# Altium PCB PCB_microdevel_actel_ascii.PcbDoc
Units mm, origin at the board's own origin, x right, y up, seen from the top; angles counter-clockwise.
Board outline 52.7 x 52.4 mm, 2 copper layers (Top Layer, Bottom Layer); 53 components, 88 nets, 326 pads, 111 vias.
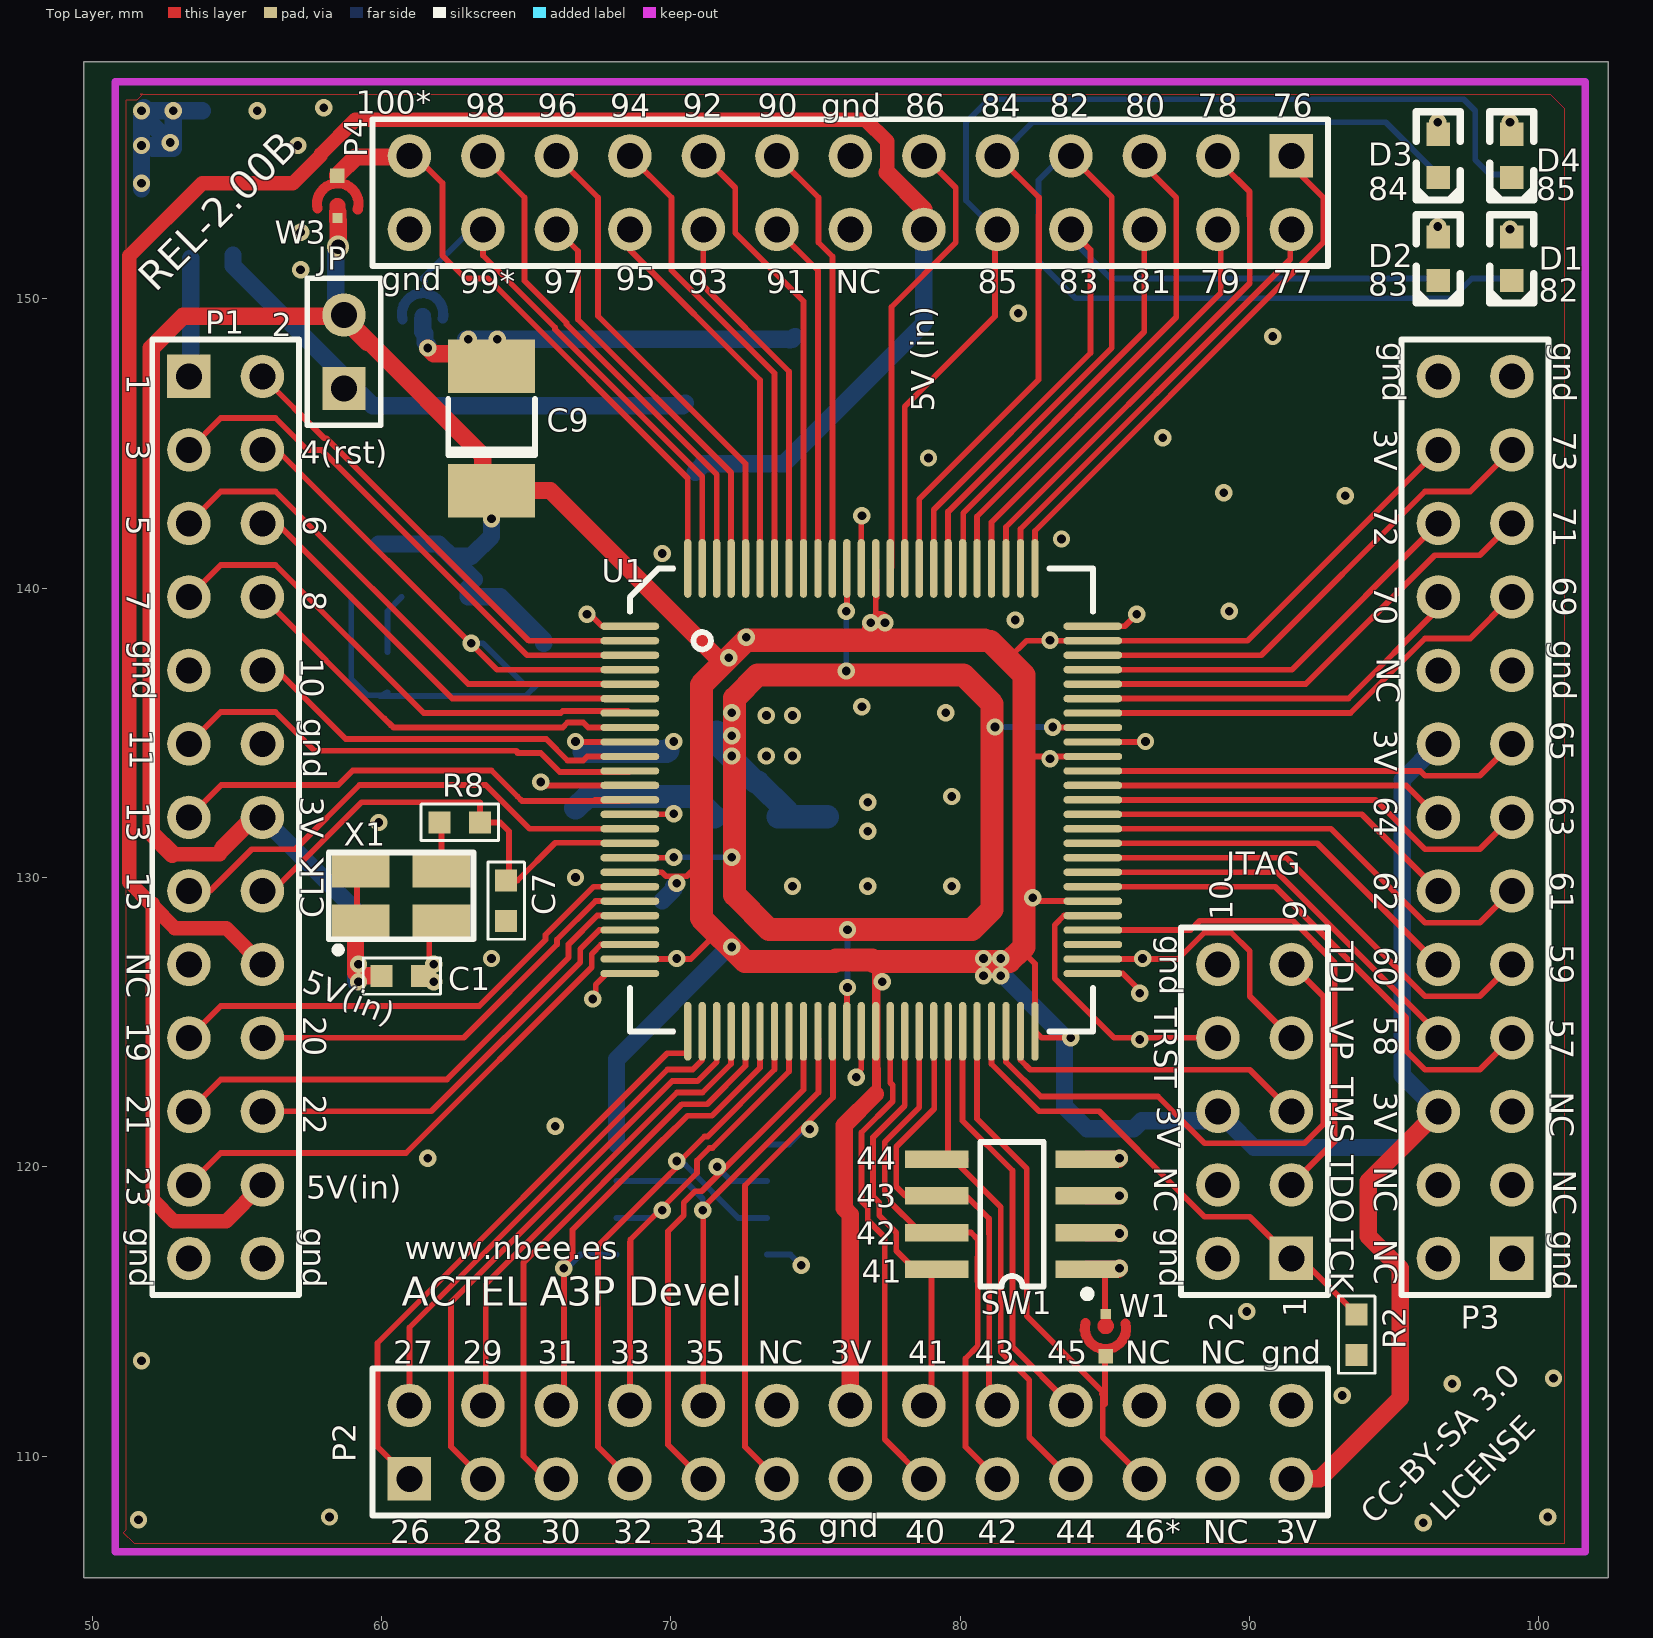
[diagram p0: Top Layer view]
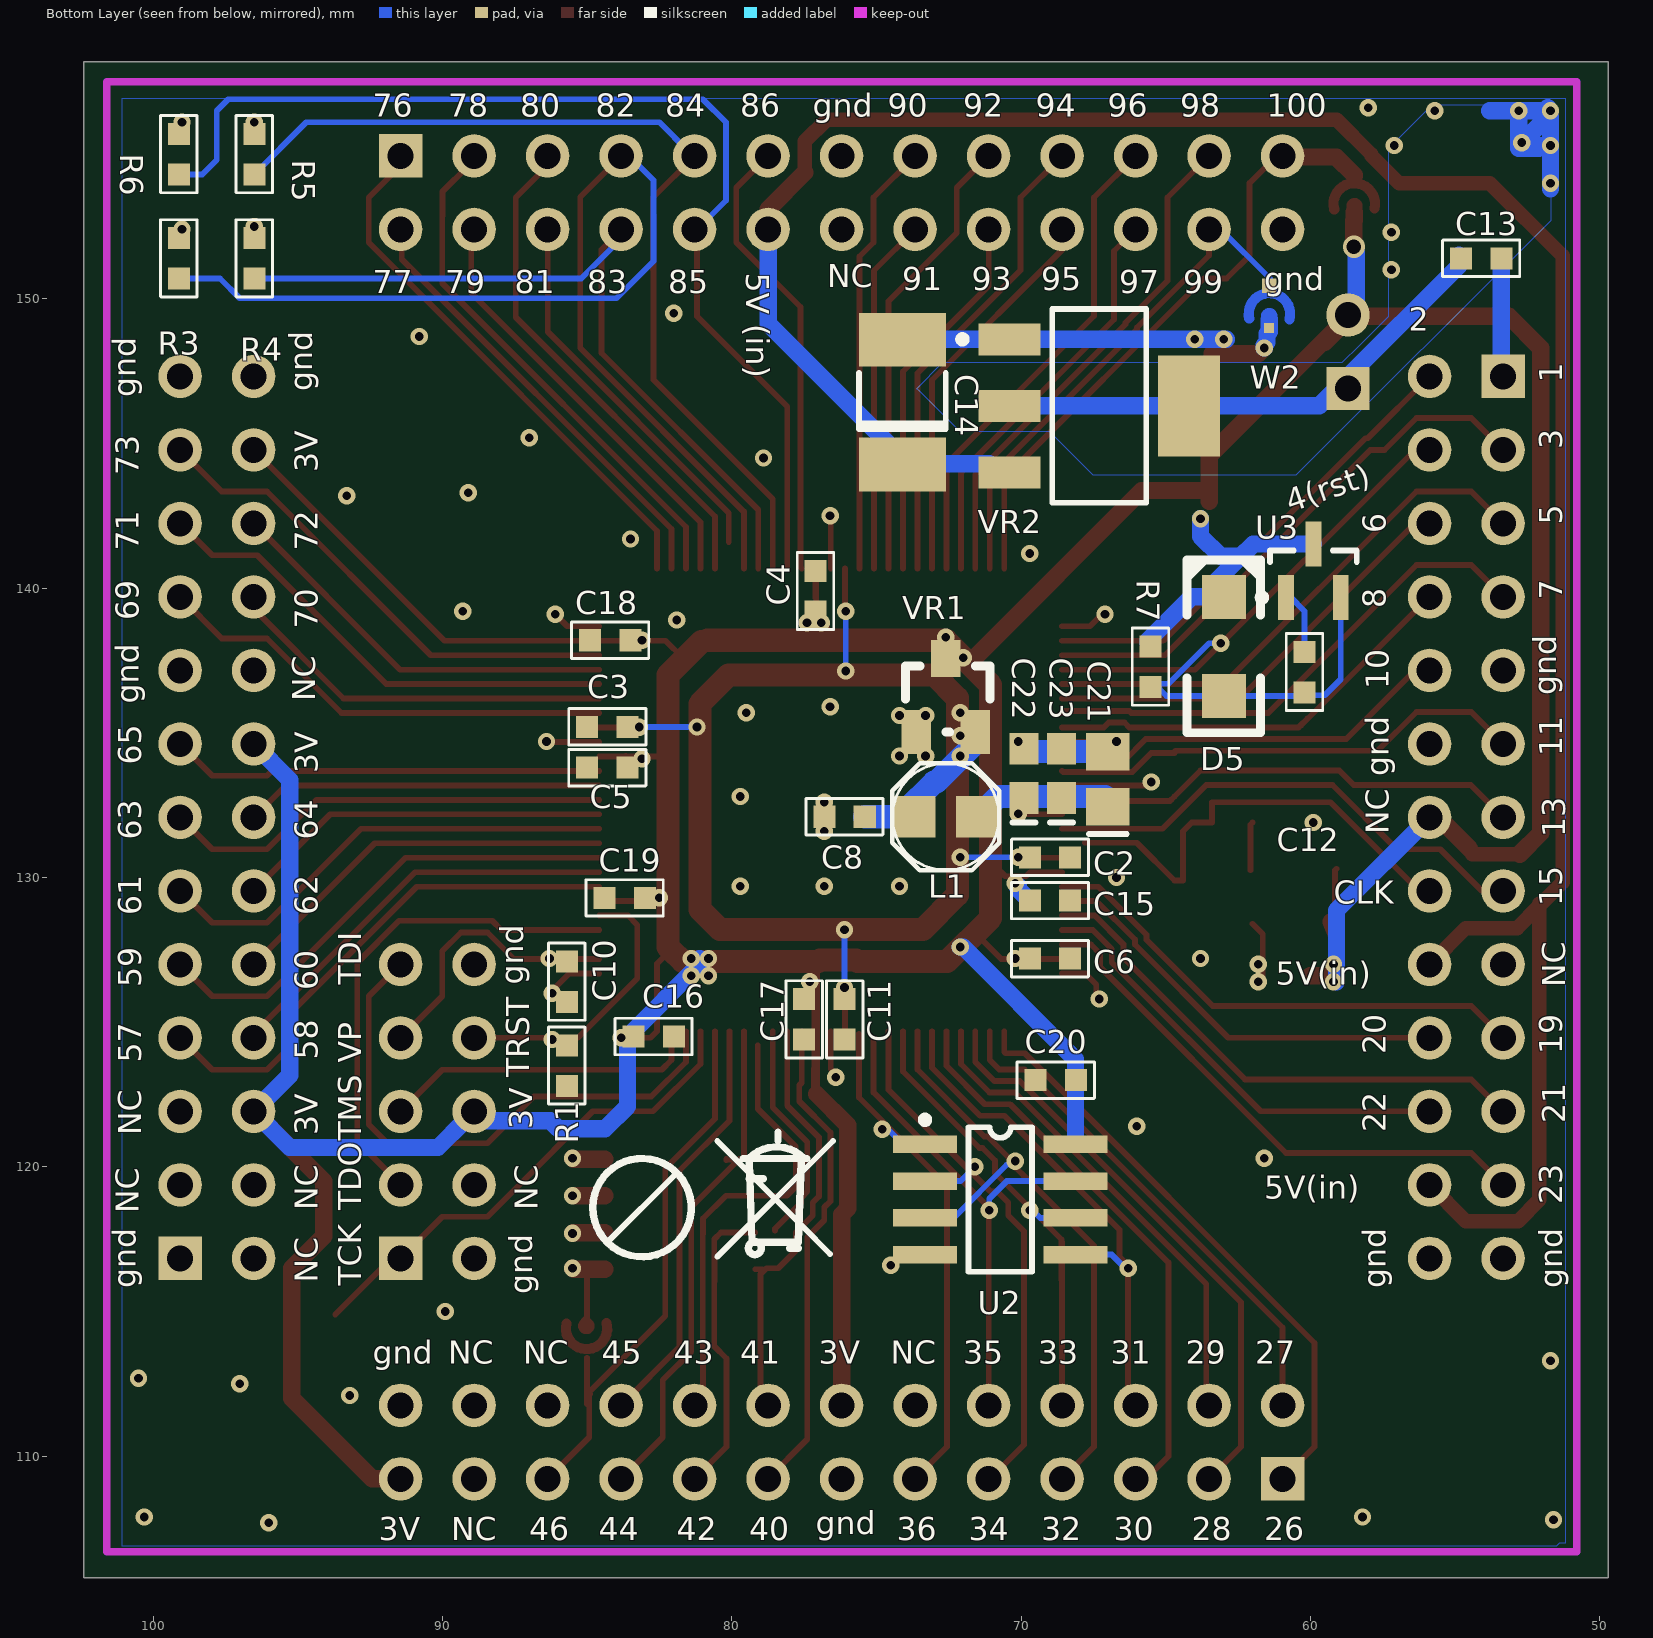
[diagram p1: Bottom Layer view, seen from below]

## Layer stack, top to bottom
Top Layer: signal copper 0.0356
Dielectric: dielectric 0.32, FR-4, Dk 4.8
Bottom Layer: signal copper 0.0356

## Board outline
50.1,158.2 102.4,158.2 102.4,139.9 102.4,105.8 73.3,105.8 49.7,105.8 49.7,158.2 50.4,158.2

## Design rules (kind name [scope] priority, off if disabled: settings)
AssemblyTestPointUsage [All] p0: scope1count=1 scope1_0_kind=Board scope1_0_value=Board scope2count=1 scope2_0_kind=Board scope2_0_value=Board commentlength=0
AssemblyTestpoint [All] p0: scope1count=1 scope1_0_kind=Board scope1_0_value=Board scope2count=1 scope2_0_kind=Board scope2_0_value=Board commentlength=0
Clearance Clearance_3 [All] p0: scope1count=1 scope1_0_kind=Layer scope1_0_value=TOP scope2count=1 scope2_0_kind=Layer scope2_0_value=TOP commentlength=0 gap=0.254
Clearance [All] p0: scope1count=1 scope1_0_kind=Layer scope1_0_value=TOP scope2count=1 scope2_0_kind=Layer scope2_0_value=TOP commentlength=0 gap=0.2
Clearance Clearance_1 [All] p0: scope1count=1 scope1_0_kind=Layer scope1_0_value=BOTTOM scope2count=1 scope2_0_kind=Layer scope2_0_value=BOTTOM commentlength=0 gap=0.2
Clearance Clearance_2 [All] p0: scope1count=1 scope1_0_kind=Layer scope1_0_value=BOTTOM scope2count=1 scope2_0_kind=Layer scope2_0_value=TOP commentlength=0 gap=0.2
Clearance Clearance_3 [OnLayer('Top Layer') vs OnLayer('Multi-Layer')] p1: gap=0.254
Clearance Clearance_1 [OnLayer('Bottom Layer') vs OnLayer('Bottom Layer')] p2: gap=0.2
Clearance [OnLayer('Top Layer') vs OnLayer('Top Layer')] p3: gap=0.2
Clearance Clearance_2 [OnLayer('Bottom Layer') vs OnLayer('Multi-Layer')] p4: gap=0.2
ComponentClearance [All] p0: scope1count=1 scope1_0_kind=Layer scope1_0_value=TOP scope2count=1 scope2_0_kind=Layer scope2_0_value=TOP commentlength=0 gap=0.02 collisioncheckmode=3
ComponentClearance ComponentClearance_1 [All] p0: scope1count=1 scope1_0_kind=Layer scope1_0_value=BOTTOM scope2count=1 scope2_0_kind=Layer scope2_0_value=BOTTOM commentlength=0 gap=0.02 collisioncheckmode=3
ComponentClearance ComponentClearance_1 [OnLayer('Bottom Layer') vs OnLayer('Bottom Layer')] p1: gap=0.02 collisioncheckmode=3 verticalgap=0.1 showdistances=FALSE
ComponentClearance [OnLayer('Top Layer') vs OnLayer('Top Layer')] p2: gap=0.02 collisioncheckmode=3 verticalgap=0.1 showdistances=FALSE
DiffPairsRouting [All] p0: scope1count=1 scope1_0_kind=Board scope1_0_value=Board scope2count=1 scope2_0_kind=Board scope2_0_value=Board commentlength=0
FabricationTestPointUsage TestPointUsage [All] p0: scope1count=1 scope1_0_kind=Board scope1_0_value=Board scope2count=1 scope2_0_kind=Board scope2_0_value=Board commentlength=0 valid=0 allowmultiple=FALSE
FabricationTestPointUsage TestPointUsage [All] p1: valid=0 allowmultiple=FALSE
FabricationTestpoint Testpoint [All] p0: scope1count=1 scope1_0_kind=Board scope1_0_value=Board scope2count=1 scope2_0_kind=Board scope2_0_value=Board commentlength=0 side=3 testpointundercomponent=TRUE minsize=1.016 maxsize=2.54 preferedsize=1.524 minholesize=0 maxholesize=1.016 preferedholesize=0.813 testpointgrid=0.025
FabricationTestpoint Testpoint [All] p1: side=3 testpointundercomponent=TRUE minsize=1.016 maxsize=2.54 preferedsize=1.524 minholesize=0 maxholesize=1.016 preferedholesize=0.813 testpointgrid=0.025 allowsidetop=TRUE allowsidebottom=TRUE usegrid=TRUE gridtolerance=0
FanoutControl Fanout_BGA [All] p0 off: scope1count=1 scope1_0_kind=Board scope1_0_value=Board scope2count=1 scope2_0_kind=Board scope2_0_value=Board commentlength=69 // Protel DXP Scope 1 Expression Was: IsBGA   Fanout_BGA (Default Rule)
FanoutControl Fanout_LCC [All] p0 off: scope1count=1 scope1_0_kind=Board scope1_0_value=Board scope2count=1 scope2_0_kind=Board scope2_0_value=Board commentlength=69 // Protel DXP Scope 1 Expression Was: IsLCC   Fanout_LCC (Default Rule)
FanoutControl Fanout_SOIC [All] p0 off: scope1count=1 scope1_0_kind=Board scope1_0_value=Board scope2count=1 scope2_0_kind=Board scope2_0_value=Board commentlength=71 // Protel DXP Scope 1 Expression Was: IsSOIC   Fanout_SOIC (Default Rule)
FanoutControl Fanout_Small [All] p0 off: scope1count=1 scope1_0_kind=Board scope1_0_value=Board scope2count=1 scope2_0_kind=Board scope2_0_value=Board commentlength=84 // Protel DXP Scope 1 Expression Was: (CompPinCount < 5)   Fanout_Small (Default Rule)
FanoutControl Fanout_Default [All] p0: scope1count=1 scope1_0_kind=Board scope1_0_value=Board scope2count=1 scope2_0_kind=Board scope2_0_value=Board commentlength=30 // Fanout_Default (Default Rule)
Height [All] p0: scope1count=1 scope1_0_kind=Board scope1_0_value=Board scope2count=1 scope2_0_kind=Board scope2_0_value=Board commentlength=0
HoleSize [All] p0: scope1count=1 scope1_0_kind=Board scope1_0_value=Board scope2count=1 scope2_0_kind=Board scope2_0_value=Board commentlength=0 absolutevalues=TRUE maxlimit=4.54 minlimit=0.025 maxpercent=80.000 minpercent=20.000
HoleSize [All] p1: absolutevalues=TRUE maxlimit=4.54 minlimit=0.025 maxpercent=80.000 minpercent=20.000
HoleToHoleClearance [All] p0: scope1count=1 scope1_0_kind=Board scope1_0_value=Board scope2count=1 scope2_0_kind=Board scope2_0_value=Board commentlength=0
LayerPairs [All] p0: scope1count=1 scope1_0_kind=Board scope1_0_value=Board scope2count=1 scope2_0_kind=Board scope2_0_value=Board commentlength=0 enforce=TRUE
MinimumSolderMaskSliver [All] p0: scope1count=1 scope1_0_kind=Board scope1_0_value=Board scope2count=1 scope2_0_kind=Board scope2_0_value=Board commentlength=0
NetAntennae [All] p0: scope1count=1 scope1_0_kind=Board scope1_0_value=Board scope2count=1 scope2_0_kind=Board scope2_0_value=Board commentlength=0
PasteMaskExpansion [All] p0: scope1count=1 scope1_0_kind=Board scope1_0_value=Board scope2count=1 scope2_0_kind=Board scope2_0_value=Board commentlength=0 expansion=0
PlaneClearance [All] p0: scope1count=1 scope1_0_kind=Board scope1_0_value=Board scope2count=1 scope2_0_kind=Board scope2_0_value=Board commentlength=0 clearance=0.508
PlaneConnect [All] p0: scope1count=1 scope1_0_kind=Board scope1_0_value=Board scope2count=1 scope2_0_kind=Board scope2_0_value=Board commentlength=0 planeconnectstyle=Relief reliefexpansion=0.508 reliefentries=4 reliefconductorwidth=0.254 reliefairgap=0.254
PolygonConnect [All] p0: scope1count=1 scope1_0_kind=Board scope1_0_value=Board scope2count=1 scope2_0_kind=Board scope2_0_value=Board commentlength=0 connectstyle=Relief reliefconductorwidth=0.254 reliefentries=4 polygonreliefangle="90 Angle"
PolygonConnect [All] p1: connectstyle=Relief reliefconductorwidth=0.254 reliefentries=4 polygonreliefangle="90 Angle" airgapwidth=0.254
RoutingCorners [All] p0: scope1count=1 scope1_0_kind=Board scope1_0_value=Board scope2count=1 scope2_0_kind=Board scope2_0_value=Board commentlength=0 cornerstyle=45-Degree minsetback=2.54 maxsetback=2.54
RoutingLayers [All] p0: scope1count=1 scope1_0_kind=Board scope1_0_value=Board scope2count=1 scope2_0_kind=Board scope2_0_value=Board commentlength=0 top layer=Automatic bottom layer=Automatic
RoutingPriority [All] p0: scope1count=1 scope1_0_kind=Board scope1_0_value=Board scope2count=1 scope2_0_kind=Board scope2_0_value=Board commentlength=0
RoutingTopology [All] p0: scope1count=1 scope1_0_kind=Board scope1_0_value=Board scope2count=1 scope2_0_kind=Board scope2_0_value=Board commentlength=0 topology=Shortest
RoutingVias [All] p0: scope1count=1 scope1_0_kind=Board scope1_0_value=Board scope2count=1 scope2_0_kind=Board scope2_0_value=Board commentlength=0 holewidth=0.3 width=0.6 viastyle="Through Hole" minholewidth=0.3 minwidth=0.5 maxholewidth=0.711 maxwidth=1.27
RoutingVias [All] p1: holewidth=0.3 width=0.6 viastyle="Through Hole" minholewidth=0.3 minwidth=0.5 maxholewidth=0.711 maxwidth=1.27
ShortCircuit [All] p0: scope1count=1 scope1_0_kind=Board scope1_0_value=Board scope2count=1 scope2_0_kind=Board scope2_0_value=Board commentlength=0 allowed=FALSE
SilkToSilkClearance [All] p0: scope1count=1 scope1_0_kind=Board scope1_0_value=Board scope2count=1 scope2_0_kind=Board scope2_0_value=Board commentlength=0
SilkscreenOverComponentPads [All] p0: scope1count=1 scope1_0_kind=Board scope1_0_value=Board scope2count=1 scope2_0_kind=Board scope2_0_value=Board commentlength=0
SilkscreenOverComponentPads [All] p1: minsilkscreentomaskgap=0.254
SolderMaskExpansion [All] p0: scope1count=1 scope1_0_kind=Board scope1_0_value=Board scope2count=1 scope2_0_kind=Board scope2_0_value=Board commentlength=0 expansion=0.102
SolderMaskExpansion [All] p1: expansion=0.102
UnRoutedNet [All] p0: scope1count=1 scope1_0_kind=Board scope1_0_value=Board scope2count=1 scope2_0_kind=Board scope2_0_value=Board commentlength=0
Width [All] p0: scope1count=1 scope1_0_kind=Board scope1_0_value=Board scope2count=1 scope2_0_kind=Board scope2_0_value=Board commentlength=0 maxlimit=0.2 minlimit=0.2 preferedwidth=0.2
Width Width_POWER [All] p0: scope1count=1 scope1_0_kind=Board scope1_0_value=Board scope2count=1 scope2_0_kind=Board scope2_0_value=Board commentlength=0 maxlimit=1 minlimit=0.2 preferedwidth=0.2
Width Width_POWER [All] p1: maxlimit=1 minlimit=0.2 preferedwidth=0.2 minimp=50.000000 maximp=50.000000 favimp=50.000000
Width [All] p2: maxlimit=0.2 minlimit=0.2 preferedwidth=0.2
23 further rules are at their usual default settings.

## Components (designator, comment, footprint, x,y, rotation, side; value= is the part's Value field where it differs from the comment)
C1 "100nF" 0603#1 60.7,126.6 r0 top
C2 "100nF" 0603#1 69,130.7 r0 bottom
C3 "100nF" 0603#1 84.3,135.2 r0 bottom
C4 "100nF" 0603#1 77.1,139.9 r270 bottom
C5 "100nF" 0603#1 84.3,133.8 r180 bottom
C6 "100nF" 0603#1 69,127.2 r180 bottom
C7 "1pF" 0603#1 64.3,129.2 r90 top
C8 "100nF" 0603#1 76.1,132.1 r180 bottom
C9 "10uF 6V" CC-6030 63.8,145.9 r90 top
C10 "100nF" 0603#1 85.7,126.4 r90 bottom
C11 "100nF" 0603#1 76.1,125.1 r90 bottom
C12 "1uF" 0603#1 60.2,137.1 r270 bottom
C13 "100nF" 0603#1 54.1,151.4 r0 bottom
C14 "http://es.farnell.com/jsp/endecaSearch/partDetail.jsp?SKU=967038&N=4011 (tántalo)" CC-6030 74.1,146.8 r90 bottom
C15 "100nF" 0603#1 69,129.2 r0 bottom
C16 "100nF" 0603#1 82.7,124.5 r0 bottom
C17 "100nF" 0603#1 77.5,125.1 r90 bottom
C18 "100nF" 0603#1 84.2,138.2 r180 bottom
C19 "100nF" 0603#1 83.7,129.3 r180 bottom
C20 "100nF" 0603#1 68.8,123 r180 bottom
C21 "10uF / 0805 / ceramic" 0805 67,133.4 r90 bottom
C22 "10nF" 0603#2 69.9,133.6 r90 bottom
C23 "100pF" 0603#2 68.6,133.6 r90 bottom
D1 "Blue led" LED_0603 99.06,151.384 r270 top
D2 "White Led" LED_0603 96.52,151.384 r270 top
D3 "Green led" LED_0603 96.52,154.94 r270 top
D4 "LED0" LED_0603 99.06,154.94 r270 top
D5 "1N4148" DIODE_1206 62.992,136.271 r90 bottom
JP "Header 2H" HDR1X2 58.7,146.9 r90 top
JTAG "2x5 pin header" HDR2X5 91.44,116.84 r90 top
L1 "6.8uH / low DCR inductor" "TOKO DB318C" 72.6,132.1 r0 bottom
P1 "(NC)  Female(Holes) Header 13X2" HDR2X13 53.34,147.32 r270 top locked
P2 "(NC)  Female(Holes) Header 13X2" HDR2X13 60.96,109.22 r0 top
P3 "(NC)  Female(Holes) Header 13X2" HDR2X13 99.06,116.84 r90 top
P4 "(NC)  Female(Holes) Header 13X2" HDR2X13 91.44,154.94 r180 top
R1 "10k" 0603#1 85.7,123.5 r90 bottom
R2 "10k" 0603#1 93.7,114.2 r90 top
R3 "330 ohm" 0603#1 99.1,151.4 r270 bottom
R4 "330 ohm" 0603#1 96.5,151.4 r270 bottom
R5 "330 ohm" 0603#1 96.5,155 r270 bottom
R6 "330 ohm" 0603#1 99.1,155 r270 bottom
R7 "100k" 0603#1 65.532,137.287 r90 bottom
R8 "50 ohm" 0603#1 62.7,131.9 r180 top
SW1 "SW DIP-4" SO8 81.788,118.364 r90 top
U1 "A3P250-VQ100" A3P060 68.58,138.684 r0 top locked
U2 "25F010" 8S1 70.72,118.872 r270 bottom
U3 "(NC) LM809" SOT23-2 59.9,140.6 r90 bottom
VR1 "LDO 1.5V" G4TOB 72.6,136.3 r180 bottom
VR2 "LM1117-3.3V" DSO-G3 67.3,146.3 r90 bottom
W1 "(NC) Jumper" JUMPER 85,114.4 r90 top
W2 "(NC)  Jumper" JUMPER 61.4,149.5 r270 bottom
W3 "(NC)  Jumper" JUMPER 58.5,153.3 r270 top
X1 "3V / 24Mhz Oscillator" "OSC 3x5mm" 60.676,129.364 r0 top

## Footprints (in the part's own frame and the unit in brackets; to place one, negate y for a bottom-side part, rotate by r counter-clockwise, add the part's x,y. Pads: shape width x height; smd on the part's side, far side on the other; paste and mask are expansions set on the pad)
8S1 [mm] "Small Outline; 8 Leads; Body Width 3.9 mm; Pitch 1.27 mm"
  rect 0.6x2.2 smd: 1(-1.905,-2.6) 2(-0.635,-2.6) 3(0.635,-2.6) 4(1.905,-2.6) 5(1.905,2.6) 6(0.635,2.6) 7(-0.635,2.6) 8(-1.905,2.6)
  silkscreen extent -2.88,-2.72 2.5,1.1
0603#1 [mil]
  rect 30x30 smd: 1(-27.5,0) 2(27.5,0)
  silkscreen extent -52,-25 52,25
0603#2 [mil] "Chip Capacitor; Body 1.6 x 0.8 mm (LxW typ)"
  rect 43.31x39.37 smd: 1(-33.46,0) 2(33.46,0)
  silkscreen extent -67,-16 -67,16
0805 [mm] "Chip Capacitor; Body 2.0 x 1.2 mm (LxW typ)"
  rect 1.3x1.5 smd: 1(-0.95,0) 2(0.95,0)
  silkscreen extent -1.9,-0.65 -1.9,0.65
A3P060 [mil]
  oval 80x10 smd: 1(0,0) 2(0,-19.68) 3(0,-39.37) 4(0,-59.05) 5(0,-78.74) 6(0,-98.42) 7(0,-118.11) 8(0,-137.8) 9(0,-157.48) 10(0,-177.17) 11(0,-196.85) 12(0,-216.54) 13(0,-236.22) 14(0,-255.91) 15(0,-275.59) 16(0,-295.28) 17(0,-314.96) 18(0,-334.65) 19(0,-354.33) 20(0,-374.02) 21(0,-393.7) 22(0,-413.39) 23(0,-433.07) 24(0,-452.76) 25(0,-472.44) 51(629.92,-472.44) 52(629.92,-452.76) 53(629.92,-433.07) 54(629.92,-413.39) 55(629.92,-393.7) 56(629.92,-374.02) 57(629.92,-354.33) 58(629.92,-334.65) 59(629.92,-314.96) 60(629.92,-295.28) 61(629.92,-275.59) 62(629.92,-255.91) 63(629.92,-236.22) 64(629.92,-216.54) 65(629.92,-196.85) 66(629.92,-177.17) 67(629.92,-157.48) 68(629.92,-137.8) 69(629.92,-118.11) 70(629.92,-98.43) 71(629.92,-78.74) 72(629.92,-59.05) 73(629.92,-39.37) 74(629.92,-19.68) 75(629.92,0)
  oval 10x80 smd: 26(78.74,-551.18) 27(98.43,-551.18) 28(118.11,-551.18) 29(137.8,-551.18) 30(157.48,-551.18) 31(177.17,-551.18) 32(196.85,-551.18) 33(216.54,-551.18) 34(236.22,-551.18) 35(255.91,-551.18) 36(275.59,-551.18) 37(295.28,-551.18) 38(314.96,-551.18) 39(334.65,-551.18) 40(354.33,-551.18) 41(374.02,-551.18) 42(393.7,-551.18) 43(413.39,-551.18) 44(433.07,-551.18) 45(452.76,-551.18) 46(472.44,-551.18) 47(492.13,-551.18) 48(511.81,-551.18) 49(531.5,-551.18) 50(551.18,-551.18) 76(551.18,78.74) 77(531.5,78.74) 78(511.81,78.74) 79(492.13,78.74) 80(472.44,78.74) 81(452.76,78.74) 82(433.07,78.74) 83(413.39,78.74) 84(393.7,78.74) 85(374.02,78.74) 86(354.33,78.74) 87(334.65,78.74) 88(314.96,78.74) 89(295.28,78.74) 90(275.59,78.74) 91(255.91,78.74) 92(236.22,78.74) 93(216.54,78.74) 94(196.85,78.74) 95(177.17,78.74) 96(157.48,78.74) 97(137.8,78.74) 98(118.11,78.74) 99(98.43,78.74) 100(78.74,78.74)
  silkscreen extent 0,-551 630,79
CC-6030 [mm]
  rect 1.85x3 smd: 1(-2.525,0) 2(1.778,0)
  silkscreen extent -1.3,-1.5 0.64,1.5
DIODE_1206 [mil]
  rect 60x60 smd: 1(0,0) 2(135,0)
  silkscreen extent -50,-50 185,50
DSO-G3 [mm] "SOT-223/SC-73; 4 Leads; Body 6.7 x 7.3 mm, inc. leads (LxW max)"
  rect 1.1x2.15 smd: 1(2.3,3.1) 2(0,3.1) 3(-2.3,3.1)
  rect 3.5x2.15 smd: 4(0,-3.1)
  silkscreen extent -3.35,-1.62 3.35,4.85
G4TOB [mil]
  rect 40x60 smd: 1(-40,-50) 3(40,-50)
  rect 40x50 smd: 2(0,50)
  silkscreen extent -55,-50 60,40
HDR1X2 [mm]
  rect 1.5x1.5 hole 0.9: 1(0,0)
  round 1.5 hole 0.9: 2(2.54,0)
  silkscreen extent -1.27,-1.27 3.81,1.27
HDR2X5 [mm] "Connector; Header; 5x2 Position"
  rect 1.5x1.5 hole 0.9: 1(0,0)
  round 1.5 hole 0.9: 2(0,2.54) 3(2.54,0) 4(2.54,2.54) 5(5.08,0) 6(5.08,2.54) 7(7.62,0) 8(7.62,2.54) 9(10.16,0) 10(10.16,2.54)
  silkscreen extent -1.27,-1.27 11.43,3.81
HDR2X13 [mm] "Connector; Header; 13x2 Position"
  rect 1.5x1.5 hole 0.9: 1(0,0)
  round 1.5 hole 0.9: 2(0,2.54) 3(2.54,0) 4(2.54,2.54) 5(5.08,0) 6(5.08,2.54) 7(7.62,0) 8(7.62,2.54) 9(10.16,0) 10(10.16,2.54) 11(12.7,0) 12(12.7,2.54) 13(15.24,0) 14(15.24,2.54) 15(17.78,0) 16(17.78,2.54) 17(20.32,0) 18(20.32,2.54) 19(22.86,0) 20(22.86,2.54) 21(25.4,0) 22(25.4,2.54) 23(27.94,0) 24(27.94,2.54) 25(30.48,0) 26(30.48,2.54)
  silkscreen extent -1.27,-1.27 31.75,3.81
JUMPER [mm]
  rect 0.5x0.5 smd mask+0: 1(-0.952,-0.025)
  rect 0.35x0.35 smd mask+0: 2(0.51,-0.025)
  Top Layer circle w0.3: c0.101,-0.025 r0.135
  Top Layer lines w0.35: 0.205,0.674 ccw(c0.018,-0.017) 0.176,-0.715
LED_0603 [mm]
  rect 0.8x0.8 smd: 1(-0.75,0) 2(0.75,0)
  silkscreen extent -1.52,-0.76 1.52,0.76
"OSC 3x5mm" [mm]
  rect 2x1.2 smd: 1(-1.397,-0.889) 2(1.397,-0.889) 3(1.397,0.889) 4(-1.397,0.889)
  silkscreen extent -2.5,-1.5 2.5,1.5
SO8 [mm] "Small Outline; 8 Leads; Body Width 3.9 mm; Pitch 1.27 mm"
  rect 0.6x2.2 smd: 1(-1.905,-2.6) 2(-0.635,-2.6) 3(0.635,-2.6) 4(1.905,-2.6) 5(1.905,2.6) 6(0.635,2.6) 7(-0.635,2.6) 8(-1.905,2.6)
  silkscreen extent -2.88,-2.72 2.5,1.1
SOT23-2 [mm] "SOT23, 3-Leads, Body 3.0x2.6mm (max), Pitch 0.95mm, IPC Medium Density"
  rect 1.55x0.55 smd: 1(-0.925,0.95) 2(-0.925,-0.95) 3(0.925,0)
  silkscreen extent -1.05,-1.5 0.7,1.9
"TOKO DB318C" [mm] "FIXED INDUCTOR for surface mounting"
  rect 1.5x1.45 smd: 1(1.1,0) 2(-1.1,0)
  silkscreen extent -1.85,-1.85 1.85,1.85

## Part data
C1 C2 C3 C4 C5 C6 C7 C8 C10 C11 C12 C13 C15 C16 C17 C18 C19 C20 C22 C23: library part "Cap Semi", "Capacitor (Semiconductor SIM Model)"
C9 C14: library part "Cap Pol3", "Polarized Capacitor (Surface Mount)"
C21: library part "Cap Semi", "10uF ceramic capacitor"
D1 D2 D3: library part LED0, "Typical INFRARED GaAs LED"
D4: "Red Led"
D5: library part Diode, "Default Diode"
JP: "Header, 2-Pin, Right Angle"
JTAG: library part "Header 5X2", "Header, 5-Pin, Dual row"
L1: library part "Inductor Iron", "Magnetic-Core Inductor"
P1 P2 P3 P4: library part "Header 13X2", "Header, 13-Pin, Dual row"
R1 R2 R3 R4 R5 R6 R7 R8: library part Res1, "Resistor"
SW1: "DIP Switch, 4 Position, SPST"
U1: library part A3P060-1VQ100, "ProASIC3 Flash Family FPGA, 71 User IOs, 60K System Gates, 18 Kbits RAM, 1 Kbit Flash ROM, 1 PLL, 100-Pin VQFP, Commercial Grade"
U3: library part LM809
VR1: library part VREG1_5
VR2: library part LM1117-3.3
W1 W2 W3: library part Jumper, "Jumper Wire"
X1: library part OSCILATOR

## Via types
v1: diameter 0.6, hole 0.3, Top Layer to Bottom Layer, tented both sides, 106 vias
v2: diameter 0.6, hole 0.3, Top Layer to Bottom Layer, 4 vias
v3: diameter 0.762, hole 0.508, Top Layer to Bottom Layer, tented both sides, 1 vias

## Nets (pads, with @x,y where several pads share a name; then routed paths per layer and width w, separated by ;. In a path a pad name is that pad's centre, name@x,y a point inside that pad or via, vN(x,y) a via of type N, cw(c..) or ccw(c..) an arc to the next point about the centre after c; other vN are vias at no path point)
GND: C1.2 C2.1 C3.2 C4.1 C5.1 C6.2 C7.1 C8.1 C9.2 C10.1 C11.1 C12.1 C13.1 C14.2 C15.1 C16.1 C17.1 C18.1 C19.1 C20.1 C21.2 C22.2 C23.2 D1.2 D2.2 D3.2 D4.2 JTAG.2 JTAG.10 P1.1 P1.9 P1.12 P1.25 P1.26 P2.13 P2.26 P3.1 P3.17 P3.25 P3.26 P4.13 P4.26 R1.1 R2.1 SW1.1 SW1.2 SW1.3 SW1.4 U1.1 U1.9 U1.12 U1.25 U1.38 U1.51 U1.67 U1.75 U1.88 U2.4 U3.1 VR1.1 VR2.1 W1.2 W2.2 X1.2 | length 50.2
  Top Layer w0.2: C1.2@61.65,126.6 61.65,128.05 X1.2@62,128.4 ; v1(65.5,133.3) 65.616,133.184 U1.12 ; v1@66.816,134.684 U1.9@68.48,134.684 ; v1@67.2,139.1 67.616,138.684 U1.1 ; v1@67.4,125.9 67.4,126.3 67.784,126.684 U1.25 ; v1@76.4,123.1 76.4,123.2 76.58,123.38 U1.38 ; U1.88 76.58,142.48 v1(76.6,142.5) ; U1.51 85.616,126.684 v1@86.2,126.1 ; U1.67 86.384,134.684 v1(86.4,134.7) ; U1.75 85.684,138.684 v1(86.1,139.1) ; SW1.1@84.9,116.4 85,116.3 85,114.8 85.1,114.7
  Top Layer w0.6: v2(61.6,148.3) 61.8,148.1 C9.2@63.4,148.1 ; SW1.1 85.459,116.459 v1(85.5,116.5) ; SW1.2 85.471,117.729 v1(85.5,117.7) ; SW1.3 SW1.3@85.4,118.999 ; SW1.4 85.469,120.269 v1(85.5,120.3)
  Bottom Layer w0.2: C12.1 60.2,139.2 U3.1@60.7,139.7 ; U2.4 74.133,116.967 v1(74.5,116.6)
  Bottom Layer w0.6: P1.1@53.4,147.3 53.402,147.302 C13.1 ; 61.414,149.3 61.427,149.287 61.427,148.861 61.5,148.788 61.5,148.5 61.6,148.4 v2(61.6,148.3) ; v2@62.9,148.6 VR2.1 74.2,148.6 74.3,148.7 C14.2
  Bottom Layer w0.8: C21.2 69.85,134.35 C22.2@69.9,134.4
  other v1: 96,107.7 51.6,107.8 58.2,107.9 100.3,107.9 93.2,112.1 97,112.5 100.5,112.7 51.7,113.3 89.9,115 85.5,119 61.6,120.3 66,121.4 76.4,123.1 67.3,125.8 86.2,126 61.8,126.4 61.8,127 63.8,127.2 74.2,129.7 76.8,129.7 79.7,129.7 66.7,130 76.8,131.6 59.9,131.9 76.8,132.6 79.7,132.8 73.3,134.2 74.2,134.2 66.7,134.7 70.1,134.7 73.3,135.6 74.2,135.6 79.5,135.7 76.6,135.9 81.9,138.9 67.1,139.1 89.3,139.2 69.7,141.2 83.5,141.7 93.3,143.2 89.1,143.3 78.9,144.5 87,145.2 90.8,148.7 82,149.5 58,156.6
  other v2: 63,148.6 64,148.6
NetC21_1: C21.1 C22.1 C23.1 L1.2 U1.14 | length 6.8
  Top Layer w0.2: U1.14 v1@70.084,132.184
  Bottom Layer w0.8: C21.1@66.7,132.4 67.1,132.8 70.8,132.8 L1.2
  other v1: 70.1,132.2
NetD1_1: D1.1 R3.1
  other v1: 99,152.4
NetD2_1: D2.1 R4.1
  other v1: 96.5,152.5
NetD3_1: D3.1 R5.1
  other v1: 96.5,156.1
NetD4_1: D4.1 R6.1
  other v1: 99,156.1
OSC24: C7.2 P1.16 R8.1 U1.16 | length 16.4
  Top Layer w0.2: P1.16 P1.16@56.142,129.54 ; P1.16@55.9,129.7 56.4,129.7 59.302,132.602 63.398,132.602 R8.1 64.1,131.9 64.4,131.6 64.4,129.9 64.7,129.9 66,131.2 U1.16@67.8,131.2
P2: P1.2 U1.2 | length 16.5
  Top Layer w0.2: P1.2 58.02,145.18 58.094,145.18 65.09,138.184 U1.2
P3: P1.3 U1.3 | length 19.1
  Top Layer w0.2: P1.3 54.444,145.884 56.337,145.884 57.441,144.78 57.928,144.78 65.024,137.684 U1.3
P5: P1.5 U1.5 | length 18.5
  Top Layer w0.2: P1.5 54.444,143.344 56.337,143.344 62.997,136.684 U1.5
P6: P1.6 U1.6 | length 15.2
  Top Layer w0.2: P1.6 56.388,142.24 62.444,136.184 U1.6
P7: P1.7 U1.7 | length 17.9
  Top Layer w0.2: P1.7 54.444,140.804 56.337,140.804 61.457,135.684 66.193,135.684 66.263,135.754 68.51,135.754 U1.7
P8: P1.8 U1.8 | length 15.1
  Top Layer w0.2: P1.8 60.327,135.253 60.347,135.253 ; 60.1,135.5 60.347,135.253 ; U1.8 67.141,135.184 66.971,135.354 66.429,135.354 66.259,135.184 60.416,135.184 60.347,135.253
P10: P1.10 U1.10 | length 14
  Top Layer w0.2: P1.10 56.388,137.16 58.764,134.784 65.691,134.784 66.429,134.046 66.971,134.046 67.109,134.184 U1.10
P11: P1.11 U1.11 | length 16.6
  Top Layer w0.2: P1.11 54.444,135.724 56.337,135.724 57.677,134.384 64.663,134.384 64.747,134.3 ; 64.7,134.3 64.747,134.3 ; U1.11 68.542,133.646 66.154,133.646 65.5,134.3 64.747,134.3
P13: P1.13 U1.13 | length 17.5
  Top Layer w0.2: P1.13 54.46,133.2 58.5,133.2 59,133.7 63.8,133.7 64.7,132.8 64.8,132.7 ; 64.854,132.646 67.346,132.646 ; 67.346,132.646 67.384,132.684 U1.13 68.542,132.646 67.346,132.646
P15: P1.15 U1.15 | length 17.4
  Top Layer w0.2: P1.15 54.079,129.54 55.515,130.976 57.012,130.976 59.236,133.2 63.6,133.2 65.116,131.684 U1.15
P19: P1.19 U1.19 | length 17.6
  Top Layer w0.2: P1.19@53.44,124.56 P1.19 54.444,125.564 63.377,125.564 65.664,127.851 65.664,128.024 67.324,129.684 U1.19
P20: P1.20 U1.20 | length 14.8
  Top Layer w0.2: P1.20 62.839,124.46 66.064,127.685 66.064,127.858 67.39,129.184 U1.20
P21: P1.21 U1.21 | length 18.3
  Top Layer w0.2: P1.21 54.444,123.024 62.255,123.024 66.464,127.233 66.464,127.692 67.456,128.684 U1.21
P22: P1.22 U1.22 | length 15.6
  Top Layer w0.2: P1.22 61.717,121.92 66.864,127.067 66.864,127.527 67.521,128.184 U1.22
P23: P1.23 U1.23 | length 18.9
  Top Layer w0.2: P1.23 54.444,120.484 60.847,120.484 67.264,126.901 67.264,127.361 67.587,127.684 U1.23
P26: P2.1 U1.26 | length 20.7
  Top Layer w0.2: P2.1 59.856,110.324 59.856,113.909 69.871,123.924 70.527,123.924 70.58,123.978 U1.26
P27: P2.2 U1.27 | length 17.6
  Top Layer w0.2: P2.2 60.96,114.448 69.88,123.368 70.757,123.368 71.08,123.691 U1.27
P28: P2.3 U1.28 | length 20.2
  Top Layer w0.2: P2.3 62.396,110.324 62.396,115.318 70.046,122.968 70.923,122.968 71.58,123.625 U1.28
P29: P2.4 U1.29 | length 16.8
  Top Layer w0.2: P2.4@63.6,111.9 63.6,115.956 70.212,122.568 71.088,122.568 72.08,123.56 U1.29
P30: P2.5 U1.30 | length 19.5
  Top Layer w0.2: P2.5@65.7,109.2 64.9,110 64.9,116.69 70.378,122.168 71.254,122.168 72.58,123.494 U1.30
P31: P2.6 U1.31 U2.5 | length 19.7
  Top Layer w0.2: P2.6@66,112.1 66.1,112.1 66.3,112.3 v1(66.3,116.5) 66.3,116.6 66.6,116.9 66.6,117.825 69.729,120.954 69.754,120.954 ; 68.6,119.8 69.754,120.954 ; U1.31 73.08,123.428 71.42,121.768 70.568,121.768 69.754,120.954
  Bottom Layer w0.2: v1(66.3,116.5) 66.4,116.5 66.867,116.967 U2.5
P32: P2.7 U1.32 U2.3 | length 22.2
  Top Layer w0.2: P2.7 67.476,110.324 67.476,117.276 70,119.8 ; 69.92,119.703 70.346,120.129 70.346,120.237 71.163,121.054 71.271,121.054 73.58,123.363 U1.32
  Bottom Layer w0.2: 70.5,120.066 72.329,118.237 U2.3
  other v1: 70.2,120.2
P33: P2.8 U1.33 U2.6 | length 18.9
  Top Layer w0.2: P2.8@68.18,112.16 P2.8 68.58,117.4 ; 68.6,116.1 68.6,117.491 70.9,119.791 70.9,120.225 71.329,120.654 71.437,120.654 74.08,123.297 U1.33
  Bottom Layer w0.2: U2.6 69.337,118.237 v1@69.7,118.6
  other v1: 69.7,118.5
P34: P2.9 U1.34 U2.2 | length 20.2
  Top Layer w0.2: P2.9@71.2,109.2 71.1,109.2 69.9,110.4 69.9,117.775 70.446,118.321 70.446,118.771 70.829,119.154 71.066,119.154 74.58,122.668 U1.34
  Bottom Layer w0.2: P2.9 P2.9@71.12,109.335 ; v1(71.6,120) 72.093,119.507 U2.2
P35: P2.10 U1.35 U2.7 | length 17.9
  Top Layer w0.2: P2.10 71.12,118.595 75.1,122.575 U1.35@75.1,124.407
  Bottom Layer w0.2: U2.7 70.493,119.507 71.1,118.9 v1(71.1,118.5)
P36: P2.11 U1.36 U2.1 | length 18.8
  Top Layer w0.2: P2.11 72.556,110.324 72.556,119.356 75.6,122.4 U1.36@75.6,124.6
  Bottom Layer w0.2: U2.1 74.077,120.777 74.6,121.3 v2(74.8,121.3)
P40: P2.15 U1.40 | length 16.8
  Top Layer w0.2: U1.40 77.58,122.91 77.669,122.822 77.669,122.271 76.588,121.19 76.588,118.815 76.8,118.603 76.8,118.157 77.388,117.569 77.388,110.583 78.74,109.231 P2.15
P41: P2.16 SW1.8 U1.41 | length 14.9
  Top Layer w0.2: U1.41 78.08,122.117 76.988,121.025 76.988,118.981 77.2,118.769 77.2,118.322 77.788,117.734 77.788,117.1 78.388,116.5 78.8,116.5 SW1.8@78.886,116.414 ; P2.16@78.8,111.7 79,111.9 79,116.3 SW1.8@78.886,116.414 ; SW1.8 78.931,116.459 SW1.8@78.886,116.414
P42: P2.17 SW1.7 U1.42 | length 19.1
  Top Layer w0.2: SW1.7@78.5,117.8 78.5,117.863 77.6,118.763 77.6,118.934 77.388,119.146 77.388,120.859 78.58,122.051 U1.42 ; SW1.7 80.371,117.729 80.6,117.5 80.6,113.8 80.176,113.376 80.176,110.324 P2.17 ; 80.588,116.035 80.588,116.883
P43: P2.18 SW1.6 U1.43 | length 16.5
  Top Layer w0.2: 77.788,119.845 77.788,119.888 ; 77.788,120.688 77.788,120.46 ; U1.43@79.1,124.2 79.1,122.005 77.788,120.693 77.788,120.46 ; SW1.6 78.677,118.999 78.601,118.999 SW1.6@78.6,119 ; P2.18 80.988,112.052 80.988,113.622 81,113.634 81,117.666 80.988,117.678 80.988,118.212 80.2,119 SW1.6@78.6,119 ; 77.788,119.888 77.788,119.812 77.788,119.312 78.1,119 SW1.6@78.6,119 ; 77.788,119.888 77.788,120.46
P44: P2.19 SW1.5 U1.44 | length 19.1
  Top Layer w0.2: U1.44 79.58,122.75 79.58,120.32 79.6,120.3 SW1.5 ; SW1.5@80.188,120.269 80.188,120.23 SW1.5 ; P2.19 82.384,110.656 82.384,112.63 81.4,113.614 81.4,118.611 79.742,120.269 79.434,120.269 SW1.5
P45: P2.20 U1.45 | length 14.5
  Top Layer w0.2: U1.45 80.08,121.596 81.8,119.876 81.8,113.78 P2.20
P46: P2.21 U1.46 W1.1 | length 19.5
  Top Layer w0.2: U1.46 80.58,121.662 82.296,119.946 82.296,114.845 84.924,112.217 84.924,112.124 ; 84.9,112.148 84.924,112.124 ; 85,111.8 W1.1@85,113.402 ; P2.21 84.924,110.656 84.924,112.124
P57: P3.7 U1.57 | length 18.2
  Top Layer w0.2: U1.57 90.883,129.684 95.416,125.151 95.416,124.003 96.063,123.356 97.956,123.356 P3.7
P58: P3.8 U1.58 | length 14.4
  Top Layer w0.2: U1.58 90.949,130.184 96.52,124.613 P3.8
P59: P3.9 U1.59 | length 16.9
  Top Layer w0.2: U1.59 91.275,130.684 96.063,125.896 97.956,125.896 P3.9
P60: P3.10 U1.60 | length 13.7
  Top Layer w0.2: U1.60 92.336,131.184 P3.10
P61: P3.11 U1.61 | length 16.3
  Top Layer w0.2: U1.61 92.815,131.684 96.063,128.436 97.956,128.436 P3.11
P62: P3.12 U1.62 | length 13
  Top Layer w0.2: U1.62 93.876,132.184 P3.12
P63: P3.13 U1.63 | length 15.6
  Top Layer w0.2: U1.63 94.355,132.684 96.063,130.976 97.956,130.976 P3.13
P64: P3.14 U1.64 | length 12.4
  Top Layer w0.2: U1.64 95.416,133.184 P3.14
P65: P3.15 U1.65 | length 15
  Top Layer w0.2: U1.65 95.895,133.684 96.063,133.516 97.956,133.516 P3.15
P69: P3.19 U1.69 | length 16.1
  Top Layer w0.2: U1.69 93.483,135.684 96.063,138.264 97.624,138.264 P3.19
P70: P3.20 U1.70 | length 13.6
  Top Layer w0.2: U1.70 93.417,136.184 96.52,139.287 P3.20
P71: P3.21 U1.71 | length 16.8
  Top Layer w0.2: U1.71 91.943,136.684 96.395,141.136 97.956,141.136 P3.21
P72: P3.22 U1.72 | length 14
  Top Layer w0.2: U1.72 91.464,137.184 P3.22
P73: P3.23 U1.73 | length 17.4
  Top Layer w0.2: U1.73 90.403,137.684 96.063,143.344 97.624,143.344 P3.23
P76: P4.1 U1.76 | length 19
  Top Layer w0.2: U1.76 82.58,140.88 82.58,141.98 91.896,151.296 91.897,151.296 92.544,151.943 92.544,152.857 92.544,153.504 91.6,154.448 91.6,154.9 91.5,154.9 P4.1@91.4,155
P77: P4.2 U1.77 | length 15.8
  Top Layer w0.2: U1.77 82.08,142.046 91.4,151.366 P4.2@91.4,152.6
P78: P4.3 U1.78 | length 18.4
  Top Layer w0.2: U1.78 81.58,142.111 90.004,150.535 90.004,152.861 90,152.865 90,153.7 89.1,154.6 P4.3@89.1,155 ; P4.3 P4.3@89.07,154.77
P79: P4.4 U1.79 | length 15
  Top Layer w0.2: U1.79 81.08,142.28 89,150.2 89,152.3 P4.4@89.05,152.25
P80: P4.5 U1.80 | length 17.8
  Top Layer w0.2: U1.80 80.58,142.243 80.58,142.48 87.464,149.364 87.464,153.504 86.6,154.368 P4.5@86.6,154.7 ; P4.5 P4.5@86.6,154.7 ; P4.5@86.6,154.9 P4.5@86.6,154.7
P81: P4.6 U1.81 | length 13.4
  Top Layer w0.2: U1.81@80.1,141.6 80.1,142.6 86.36,148.86 P4.6
P82: P4.7 R3.2 U1.82 | length 38.5
  Top Layer w0.2: U1.82 79.58,142.646 85.236,148.302 85.236,153.524 P4.7
  Bottom Layer w0.2: P4.7@83.6,155 82.7,154.1 82.7,151.3 83.979,150.021 97.005,150.021 97.686,150.701 R3.2
P83: P4.8 R4.2 U1.83 | length 27.2
  Top Layer w0.2: U1.83 79.08,142.711 84.5,148.131 84.5,151.7 P4.8@83.9,152.3
  Bottom Layer w0.2: P4.8@83.9,152 85.199,150.701 R4.2
P84: P4.9 R5.2 U1.84 | length 34.6
  Top Layer w0.2: U1.84 78.58,143.08 82.7,147.2 82.7,152.9 ; P4.9 82.716,153.504 82.716,151.022
  Bottom Layer w0.2: P4.9@81.5,155.1 82.5,156.1 94.701,156.1 R5.2
P85: P4.10 R6.2 U1.85 | length 38.9
  Top Layer w0.2: U1.85 78.08,146.28 81.2,149.4 P4.10@81.2,152.7
  Bottom Layer w0.2: P4.10@81.3,152.3 80.2,153.4 80.2,156.1 81,156.9 97.4,156.9 97.8,156.5 97.8,154.8 98.299,154.301 R6.2
P86: P4.11 U1.86 | length 15.7
  Top Layer w0.2: U1.86 77.621,140.725 77.621,149.72 79.844,151.943 79.844,153.836 P4.11
P90: P4.15 U1.90 | length 15.1
  Top Layer w0.2: P4.15 75.096,153.504 75.096,151.943 75.58,151.459 U1.90
P91: P4.16 U1.91 | length 12.3
  Top Layer w0.2: P4.16 75.08,150.98 U1.91
P92: P4.17 U1.92 | length 15.7
  Top Layer w0.2: P4.17 72.224,153.836 72.224,152.275 74.58,149.919 U1.92
P93: P4.18 U1.93 | length 12.9
  Top Layer w0.2: P4.18 71.12,150.453 74.08,147.493 U1.93
P94: P4.19 U1.94 | length 16.3
  Top Layer w0.2: P4.19 70.016,153.504 70.016,150.991 73.58,147.427 U1.94
P95: P4.20 U1.95 | length 13.6
  Top Layer w0.2: P4.20 68.58,151.696 73.08,147.196 U1.95
P96: P4.21 U1.96 | length 17
  Top Layer w0.2: P4.21 67.476,153.504 67.476,149.403 72.58,144.299 U1.96
P97: P4.22 U1.97 | length 14.2
  Top Layer w0.2: P4.22 66.789,151.651 66.789,149.284 72.08,143.993 U1.97
P98: P4.23 U1.98 | length 17.6
  Top Layer w0.2: P4.23 64.936,153.504 64.936,150.627 66.389,149.173 66.389,149.118 71.58,143.927 U1.98
P99: P4.24 U1.99 W2.1 | length 19
  Top Layer w0.2: P4.24 63.5,151.497 65.989,149.008 65.989,148.952 71.08,143.862 U1.99
  Bottom Layer w0.2: W2.1@61.5,150.4 61.5,150.6 61.4,150.7 63.1,152.4 P4.24 ; P4.24@63.5,151.8 P4.24 ; P4.24@63.5,152.07 P4.24 ; P4.24@63.525,152.425 P4.24@63.575,152.425
P100: P4.25 U1.100 W3.1 | length 22.2
  Top Layer w0.2: P4.25 P4.25@61,154.9 ; P4.25@61.2,154.9 62.1,154 62.1,152.239 ; 62.1,152.7 62.1,152.239 ; U1.100 70.58,143.796 63.676,150.7 62.9,150.7 62.1,151.5 62.1,152.239
  Top Layer w0.6: W3.1 58.475,154.275 59.1,154.9 61,154.9 P4.25@61.1,154.9
  Bottom Layer w0.6: P4.25@60.924,154.824 P4.25@61.1,155
RESET: C12.2 D5.1 P1.4 R7.1 U1.4 U3.2 | length 29.1
  Top Layer w0.2: P1.4 56.388,144.78 63.984,137.184 U1.4
  Bottom Layer w0.2: U3.2 58.95,136.85 59.5,136.3 C12.2@60.2,136.3 ; C12.2 59.944,136.271 D5.1 64.971,136.271 R7.1@65.4,136.7 ; v1(63.1,138.1) 63.5,138.1 64.9,136.7 R7.1@65.4,136.7 ; R7.1@65.5,136.7 R7.1@65.4,136.7
TCK: JTAG.1 R2.2 U1.47 | length 17.3
  Top Layer w0.2: U1.47 81.08,123.56 82.72,121.92 84.805,121.92 86.154,120.571 86.154,120.565 88.443,118.276 90.004,118.276 JTAG.1 91.76,116.84 R2.2
TDI: JTAG.9 U1.48 | length 19.4
  Top Layer w0.2: U1.48 81.58,123.625 82.777,122.428 86.831,122.428 88.443,120.816 91.897,120.816 92.544,121.463 92.544,125.896 JTAG.9
TDO: JTAG.3 U1.54 | length 17.4
  Top Layer w0.2: U1.54 87.957,128.184 88.277,128.504 91.497,128.504 92.944,127.057 92.944,120.884 JTAG.3
TMS: JTAG.5 U1.49 | length 11.1
  Top Layer w0.2: U1.49 82.08,123.691 82.415,123.356 90.004,123.356 JTAG.5
TRST: JTAG.8 R1.2 U1.55 | length 9.8
  Top Layer w0.2: U1.55 83.587,128.684 83.264,128.361 83.264,126.507 85.311,124.46 JTAG.8
  other v1: 86.2,124.4
V15: C2.2 C3.1 C8.2 C11.2 L1.1 U1.17 U1.37 U1.68 U1.89 VR1.3 | length 52.7
  Top Layer w0.2: U1.17 70.084,130.684 v1(70.1,130.7) ; v1(76.06,139.2) 76.08,139.22 U1.89 ; U1.37 76.08,126.18 v1(76.1,126.2) ; v1(83.2,135.2) 83.216,135.184 U1.68
  Top Layer w0.8: 72.2,129.4 72.2,136.2 73,137 80.1,137 81.1,136 81.1,128.9 80.4,128.2 v1(76.1,128.2) 73.4,128.2 72.2,129.4
  Bottom Layer w0.2: v1(70.1,130.7) v1(72.1,130.7) ; v1(76.06,137.14) v1(76.06,139.2) ; v1(76.1,126.2) v1(76.1,128.2) ; v1(81.2,135.2) v1(83.2,135.2)
  Bottom Layer w0.8: VR1.3 71.584,134.643 72.927,133.3 73,133.3 L1.1@74,132.3 ; L1.1 C8.2@75.4,132.1
  other v1: 72.1,134.2 72.1,134.9 72.1,135.7
VCC: C1.1 C4.2 C5.2 C6.1 C9.1 C15.2 C16.2 C17.2 C18.2 C19.2 C20.2 D5.2 JP.2 JTAG.6 P1.14 P2.14 P2.25 P3.6 P3.16 P3.24 R7.2 U1.18 U1.24 U1.39 U1.50 U1.56 U1.66 U1.74 U1.87 U2.8 U3.3 VR1.2 W3.2 X1.1 X1.4 | length 256.2
  Top Layer w0.2: 52.883,130.976 52.236,131.623 52.236,148.217 53.371,149.352 JP.2@58.42,149.352 ; 54.5,131 54.6,131 ; X1.4@59.1,130.3 59.152,130.248 59.152,126.648 v1@59.152,126.316 ; U1.24 70.684,127.184 71.55,128.05 ; U1.18 69.691,130.184 69.829,130.046 70.546,130.046 70.7,130.2 ; P2.14@76.188,111.772 P2.14 ; 76.9,127.2 76.946,127.154 77,127.1 77.08,127.02 U1.39 ; v1@77.08,138.82 U1.87 ; U1.87@77.1,139.671 U1.87@77.1,140.6 ; 81.7,137.6 82.284,138.184 U1.74 89.924,138.184 P3.24 ; 82,127.6 82.05,127.55 82.1,127.5 82.58,127.02 U1.50 82.804,124.46 v1(83.82,124.46) ; v1@82.4,129.3 82.516,129.184 U1.56 ; 82.5,134.2 82.516,134.184 U1.66@83.664,134.184 ; U1.66@83.664,134.209 U1.66@83.664,134.184 ; U1.66 U1.66@83.664,134.184 ; P3.16@96.084,134.184 P3.16
  Top Layer w0.3: 77.069,122.519 77.104,122.555 77.104,123.391 ; 77.1,123.4 U1.39@77.1,123.942 ; U1.39@77.1,124 77.1,126.8
  Top Layer w0.4: 54.41,130.81 54.6,131 54.8,131.2 ; P1.14@55.6,132.1 P1.14@56,132.1
  Top Layer w0.5: 52.766,130.81 54.41,130.81
  Top Layer w0.6: 52.766,130.81 52.036,131.54 52.036,148.299 53.137,149.4 58.6,149.4 JP.2@58.648,149.352 ; 54.5,131 P1.14@55.6,132.1 ; JP.2@58.42,149.352 JP.2@58.648,149.352 ; 58.486,153 58.486,152.714 58.5,152.7 v3@58.5,151.9 ; v3(58.5,151.8) v3@58.5,151.9 ; v3@58.525,151.925 v3@58.5,151.9 ; X1.1 59.1,128 59.1,126.7 59.152,126.648 59.2,126.6 C1.1 ; C9.1@63.5,143 63.5,144.581 59.591,148.491 ; C9.1 65.825,143.375 71.6,137.6 v1@71.8,137.6 ; P2.14 76.2,118.354 75.988,118.566 75.988,121.439 77.069,122.519 ; P2.25 92.42,109.22 95.2,112 95.2,116.5 94.1,117.6 94.1,119.5 P3.6@96.5,121.9 ; JP.2@58.648,149.352 58.729,149.352 59.591,148.491 ; JP.2@58.648,149.352 59.509,148.491 59.591,148.491
  Top Layer w0.8: 76.946,127.154 75.705,127.154 75.651,127.1 72.554,127.1 71.054,128.6 71.054,136.654 72.6,138.2 80.841,138.2 ; 77,127.1 81.7,127.1 82.1,127.5 82.2,127.6 82.2,137 81.05,138.15 ; v1@77,138.6 v1@77.22,138.82
  Bottom Layer w0.2: v1@59.1,126.5 v1(59.2,126.4)
  Bottom Layer w0.6: P1.14 59.1,128.86 59.1,126.5 v1@59.1,126.4 ; JP.2@58.42,149.352 v3@58.42,151.6 ; U3.3 61.975,141.525 62.4,141.1 ; D5.2 D5.2@62.992,140.008 ; D5.2@63.1,139.7 64.1,139.7 65.6,138.2 R7.2@65.6,138.1 ; D5.2@63.2,140.3 62.4,141.1 ; v1(63.8,142.4) 63.8,141.8 63.1,141.1 62.4,141.1 ; U2.8 68.12,123.72 72,127.6 v1(72.1,127.6) ; C15.2 70.1,129.602 v1@70.1,129.7 ; v1@81.1,127.2 81.1,127 83.6,124.5 83.6,122.1 84.379,121.321 85.988,121.321 86.268,121.6 JTAG.6@89.22,121.6 ; JTAG.6 JTAG.6@89.22,121.6 ; P3.16 95.27,133.37 95.27,123.17 P3.6 95.27,120.67 90.15,120.67 JTAG.6@89.22,121.6
  other v1: 77.3,126.4 80.8,126.6 81.4,126.6 59.2,127 70.2,127.2 80.8,127.2 81.4,127.2 82.5,129.3 70.2,129.8 83.1,134.1 72,137.6 83.1,138.2 72.6,138.3 76.9,138.8 77.4,138.8
VCC3-2: C13.2 JP.1 VR2.2 VR2.4 | length 26.4
  Bottom Layer w0.6: v1@51.7,153.8 v1(51.7,154) v1(51.7,155.3) 51.7,156.3 51.9,156.5 v1(52.8,156.5) ; v1@51.8,156.6 51.8,156.3 v1(52.7,155.4) ; 52,155.3 52.1,155.2 52.8,155.2 v1(52.8,156.5) ; 53.8,156.5 v1(52.8,156.5) ; C13.2@54.864,151.511 54.864,151.14 58.806,147.198 58.902,147.102 59.7,146.304 70.404,146.304 VR2.2@70.5,146.4
  other v1: 57.2,151 57.2,152.3 57.1,155.3 51.7,156.5 55.7,156.5
VCC5: C14.1 P1.18 P1.24 P4.12 VR2.3 | length 87.6
  Top Layer w0.5: P1.24 54.626,118.126 52.821,118.126 52.086,118.861 52.086,129.021 ; P1.18 54.626,128.254 52.853,128.254 52.086,129.021 ; 77.47,154.366 77.47,155.443 76.719,156.194 59.094,156.194 57.904,155.004 57.904,154.967 56.937,154 53.8,154 51.286,151.486 51.286,129.836 52.022,129.1 52.086,129.1 52.086,129.021
  Top Layer w0.6: 77.47,154.366 78.74,153.096 P4.12
  Bottom Layer w0.6: VR2.3@70.837,144.004 VR2.3@71.12,144.287 ; VR2.3@71.1,144.3 73.9,144.3 78.74,149.14 P4.12
VPUMP: C10.2 JTAG.7 U1.52 | length 9.7
  Top Layer w0.2: U1.52 87.523,127.184 88.443,128.104 89.357,128.104 90.004,127.457 90.004,125.896 JTAG.7
  other v1: 86.3,127.2
XOSC24: R8.2 X1.3 | length 1.7
  Top Layer w0.2: R8.2@62,131.9 62.073,131.827 X1.3
pads on no net: JTAG.4 P1.17 P2.12 P2.22 P2.23 P2.24 P3.2 P3.3 P3.4 P3.5 P3.18 P4.14 U1.53

## Polygon pours and split planes (outlines as drawn)
GND on Top Layer "GND BOTTOM" (solid, remove dead copper, pour order 1000): 51.653,157.069 100.396,157.069 100.78,156.678 100.876,156.581 100.876,106.969 51.461,106.969 51.076,107.36 51.173,107.457 51.173,156.874 51.557,156.874 51.749,157.069
VCC3-2 on Bottom Layer "Top Layer-No Net" (solid, remove dead copper, pour order 6): 73.6,146.9 72.7,147.8 69,147.8 58.9,147.8 58.3,148.4 57.3,149.4 57.3,153.2 57.3,155.2 56,156.5 55.8,156.7 51.7,156.7 51.7,152.7 51.8,152.6 60.5,143.9 66,143.9 67.5,143.9 68.9,145.3 69,145.4 71.6,145.4 72.1,145.4 73.5,146.8
GND on Bottom Layer "GND BOTTOM" (solid, remove dead copper, pour order 1002): 51.178,156.909 101.078,156.909 101.078,146.809 101.078,106.909 85.078,106.909 51.478,106.909 51.378,107.009 51.178,107.009 51.178,123.509 51.178,156.909

## Keep-outs
Keep-Out Layer:
  lines w0.254: 50.8,106.7 50.8,157.5 101.6,157.5 101.6,106.7 50.8,106.7

## Silkscreen, mask and mechanical layers (free items; w line width, h text height)
Top Overlay:
  circle w0.254: c58.5,127.5 r0.1
  text "100*" at 59.1,156.4 h0.8
  text "98" at 62.9,156.3 h0.8
  text "96" at 65.4,156.3 h0.8
  text "94" at 67.9,156.3 h0.8
  text "92" at 70.4,156.3 h0.8
  text "90" at 73,156.3 h0.8
  text "gnd" at 75.2,156.3 h0.8
  text "86" at 78.1,156.3 h0.8
  text "84" at 80.7,156.3 h0.8
  text "82" at 83.1,156.3 h0.8
  text "80" at 85.7,156.3 h0.8
  text "78" at 88.2,156.3 h0.8
  text "76" at 90.8,156.3 h0.8
  text "84" at 94.1,153.4 h0.8
  text "85" at 99.9,153.4 h0.8
  text "gnd" at 60,150.3 h0.8
  text "95" at 68.1,150.3 h0.8
  text "REL-2.00B" at 52.2,150.2 h1 r45
  text "99*" at 62.7,150.2 h0.8
  text "97" at 65.6,150.2 h0.8
  text "93" at 70.6,150.2 h0.8
  text "91" at 73.3,150.2 h0.8
  text "NC" at 75.7,150.2 h0.8
  text "85" at 80.6,150.2 h0.8
  text "83" at 83.4,150.2 h0.8
  text "81" at 85.9,150.2 h0.8
  text "79" at 88.3,150.2 h0.8
  text "77" at 90.8,150.2 h0.8
  text "83" at 94.1,150.1 h0.8
  text "82" at 100,149.9 h0.8
  text "2" at 56.2,148.7 h0.8
  text "gnd" at 94.6,148.5 h0.8 r270
  text "gnd" at 100.5,148.5 h0.8 r270
  text "1" at 51.2,147.4 h0.8 r270
  text "5V (in)" at 79.1,146.1 h0.8 r90
  text "3V" at 94.3,145.5 h0.8 r270
  text "73" at 100.5,145.4 h0.8 r270
  text "3" at 51.2,145.1 h0.8 r270
  text "4(rst)" at 57.2,144.3 h0.8
  text "72" at 94.3,142.8 h0.8 r270
  text "71" at 100.5,142.8 h0.8 r270
  text "5" at 51.2,142.5 h0.8 r270
  text "6" at 57.3,142.5 h0.8 r270
  text "69" at 100.5,140.4 h0.8 r270
  text "70" at 94.3,140.1 h0.8 r270
  text "7" at 51.2,139.9 h0.8 r270
  text "8" at 57.3,139.9 h0.8 r270
  text "gnd" at 51.4,138.2 h0.8 r270
  text "gnd" at 100.5,138.2 h0.8 r270
  text "10" at 57.2,137.6 h0.8 r270
  text "NC" at 94.4,137.6 h0.8 r270
  text "gnd" at 57.3,135.5 h0.8 r270
  text "65" at 100.4,135.4 h0.8 r270
  text "11" at 51.3,135.1 h0.8 r270
  text "3V" at 94.3,135.1 h0.8 r270
  text "3V" at 57.2,132.8 h0.8 r270
  text "64" at 94.3,132.8 h0.8 r270
  text "63" at 100.4,132.8 h0.8 r270
  text "13" at 51.2,132.6 h0.8 r270
  text "15" at 51.2,130.2 h0.8 r270
  text "62" at 94.3,130.2 h0.8 r270
  text "61" at 100.4,130.2 h0.8 r270
  text "CLK" at 58,128.6 h0.8 r90
  text "gnd" at 86.9,128 h0.8 r270
  text "TDI" at 92.8,127.8 h0.8 r270
  text "59" at 100.4,127.7 h0.8 r270
  text "60" at 94.3,127.6 h0.8 r270
  text "NC" at 51.2,127.4 h0.8 r270
  text "5V(in)" at 57.2,126.1 h0.8 r337.99
  text "TRST" at 86.7,125.5 h0.8 r270
  text "20" at 57.3,125.2 h0.8 r270
  text "58" at 94.3,125.2 h0.8 r270
  text "VP" at 92.8,125.1 h0.8 r270
  text "57" at 100.4,125.1 h0.8 r270
  text "19" at 51.2,125 h0.8 r270
  text "TMS" at 92.8,123.1 h0.8 r270
  text "3V" at 94.3,122.6 h0.8 r270
  text "NC" at 100.4,122.6 h0.8 r270
  text "21" at 51.2,122.5 h0.8 r270
  text "22" at 57.3,122.5 h0.8 r270
  text "3V" at 86.8,122.1 h0.8 r270
  text "TDO" at 92.8,120.4 h0.8 r270
  text "23" at 51.2,120 h0.8 r270
  text "NC" at 86.7,120 h0.8 r270
  text "NC" at 94.3,120 h0.8 r270
  text "44" at 76.4,119.9 h0.8
  text "NC" at 100.5,119.9 h0.8 r270
  text "5V(in)" at 57.4,118.9 h0.8
  text "43" at 76.4,118.6 h0.8
  text "gnd" at 51.3,117.9 h0.8 r270
  text "gnd" at 57.3,117.9 h0.8 r270
  text "gnd" at 86.9,117.9 h0.8 r270
  text "TCK" at 92.8,117.8 h0.8 r270
  text "gnd" at 100.5,117.8 h0.8 r270
  text "NC" at 94.3,117.5 h0.8 r270
  text "42" at 76.4,117.3 h0.8
  text "www.nbee.es" at 60.8,116.8 h0.8
  text "41" at 76.6,116 h0.8
  text "ACTEL A3P Devel" at 60.7,115.2 h1
  text "27" at 60.4,113.2 h0.8
  text "29" at 62.8,113.2 h0.8
  text "31" at 65.4,113.2 h0.8
  text "33" at 67.9,113.2 h0.8
  text "35" at 70.5,113.2 h0.8
  text "NC" at 73,113.2 h0.8
  text "3V" at 75.5,113.2 h0.8
  text "41" at 78.2,113.2 h0.8
  text "43" at 80.5,113.2 h0.8
  text "45" at 83,113.2 h0.8
  text "NC" at 85.7,113.2 h0.8
  text "NC" at 88.3,113.2 h0.8
  text "gnd" at 90.4,113.2 h0.8
  text "LICENSE" at 96.7,107.7 h0.8 r45
  text "CC-BY-SA 3.0" at 94.3,107.6 h0.8 r45
  text "gnd" at 75.1,107.2 h0.8
  text "26" at 60.3,107 h0.8
  text "28" at 62.8,107 h0.8
  text "30" at 65.5,107 h0.8
  text "32" at 68,107 h0.8
  text "34" at 70.5,107 h0.8
  text "36" at 73,107 h0.8
  text "40" at 78.1,107 h0.8
  text "42" at 80.6,107 h0.8
  text "44" at 83.3,107 h0.8
  text "46*" at 85.7,107 h0.8
  text "NC" at 88.4,107 h0.8
  text "3V" at 90.9,107 h0.8
Bottom Overlay:
  circle w0.254: c83.099,118.592 r1.7
  lines w0.2: 76.499,120.892 80.499,116.892 ; 76.599,116.992 77.574,117.967 79.524,119.917 80.499,120.892 ; 81.899,119.792 84.299,117.392
  lines w0.254: 77.399,120.292 79.599,120.292 ; 77.494,120.297 cw(c78.449,119.342) 79.404,120.297 ; 77.599,120.192 77.699,117.392 79.299,117.392 79.399,120.192 ; 77.699,117.192 77.999,117.192 ; 78.399,120.892 78.399,121.192 ; 78.899,119.592 79.399,119.592 ; 79.416,117.246 ccw(c79.199,117.192) 79.423,117.192
  text "100" at 61.5,156.3 h0.8
  text "98" at 64.5,156.3 h0.8
  text "96" at 67,156.3 h0.8
  text "94" at 69.5,156.3 h0.8
  text "92" at 72,156.3 h0.8
  text "90" at 74.6,156.3 h0.8
  text "gnd" at 77.2,156.3 h0.8
  text "86" at 79.7,156.3 h0.8
  text "84" at 82.3,156.3 h0.8
  text "82" at 84.7,156.3 h0.8
  text "80" at 87.3,156.3 h0.8
  text "78" at 89.8,156.3 h0.8
  text "76" at 92.4,156.3 h0.8
  text "5V (in)" at 79.5,150.9 h0.8 r90
  text "NC" at 76.7,150.4 h0.8
  text "gnd" at 61.6,150.3 h0.8
  text "95" at 69.3,150.3 h0.8
  text "93" at 71.7,150.3 h0.8
  text "91" at 74.1,150.3 h0.8
  text "99" at 64.4,150.2 h0.8
  text "97" at 66.6,150.2 h0.8
  text "85" at 82.2,150.2 h0.8
  text "83" at 85,150.2 h0.8
  text "81" at 87.5,150.2 h0.8
  text "79" at 89.9,150.2 h0.8
  text "77" at 92.4,150.2 h0.8
  text "2" at 56.6,148.9 h0.8
  text "1" at 51.3,147.1 h0.8 r270
  text "gnd" at 94.5,146.8 h0.8 r270
  text "gnd" at 100.6,146.6 h0.8 r270
  text "3" at 51.3,144.8 h0.8 r270
  text "3V" at 94.3,144 h0.8 r270
  text "73" at 100.5,143.9 h0.8 r270
  text "4(rst)" at 60.7,142.6 h0.8 r341.22
  text "5" at 51.3,142.2 h0.8 r270
  text "6" at 57.4,141.9 h0.8 r270
  text "72" at 94.3,141.3 h0.8 r270
  text "71" at 100.5,141.3 h0.8 r270
  text "7" at 51.3,139.6 h0.8 r270
  text "8" at 57.4,139.3 h0.8 r270
  text "69" at 100.5,138.9 h0.8 r270
  text "70" at 94.3,138.6 h0.8 r270
  text "10" at 57.3,136.5 h0.8 r270
  text "gnd" at 51.5,136.3 h0.8 r270
  text "NC" at 94.4,136.1 h0.8 r270
  text "gnd" at 100.5,136 h0.8 r270
  text "11" at 51.3,134.2 h0.8 r270
  text "65" at 100.4,133.9 h0.8 r270
  text "3V" at 94.3,133.6 h0.8 r270
  text "gnd" at 57.3,133.5 h0.8 r270
  text "NC" at 57.3,131.5 h0.8 r270
  text "13" at 51.2,131.4 h0.8 r270
  text "64" at 94.3,131.3 h0.8 r270
  text "63" at 100.4,131.3 h0.8 r270
  text "CLK" at 59.2,129.1 h0.8
  text "15" at 51.3,129 h0.8 r270
  text "62" at 94.3,128.7 h0.8 r270
  text "61" at 100.4,128.7 h0.8 r270
  text "5V(in)" at 61.2,126.3 h0.8
  text "gnd" at 87.2,126.3 h0.8 r270
  text "TDI" at 92.8,126.3 h0.8 r270
  text "NC" at 51.2,126.2 h0.8 r270
  text "59" at 100.4,126.2 h0.8 r270
  text "60" at 94.3,126.1 h0.8 r270
  text "19" at 51.3,123.9 h0.8 r270
  text "20" at 57.4,123.9 h0.8 r270
  text "58" at 94.3,123.7 h0.8 r270
  text "VP" at 92.8,123.6 h0.8 r270
  text "57" at 100.4,123.6 h0.8 r270
  text "TRST" at 87,123.1 h0.8 r270
  text "21" at 51.2,121.5 h0.8 r270
  text "3V" at 86.9,121.3 h0.8 r270
  text "22" at 57.4,121.2 h0.8 r270
  text "3V" at 94.3,121.1 h0.8 r270
  text "NC" at 100.4,121.1 h0.8 r270
  text "TMS" at 92.8,120.9 h0.8 r270
  text "5V(in)" at 61.6,118.9 h0.8
  text "23" at 51.3,118.7 h0.8 r270
  text "NC" at 86.7,118.5 h0.8 r270
  text "TDO" at 92.8,118.5 h0.8 r270
  text "NC" at 94.3,118.5 h0.8 r270
  text "NC" at 100.5,118.4 h0.8 r270
  text "NC" at 94.3,116 h0.8 r270
  text "TCK" at 92.8,115.9 h0.8 r270
  text "gnd" at 51.3,115.8 h0.8 r270
  text "gnd" at 57.4,115.8 h0.8 r270
  text "gnd" at 100.6,115.8 h0.8 r270
  text "gnd" at 86.9,115.6 h0.8 r270
  text "27" at 61.9,113.2 h0.8
  text "29" at 64.3,113.2 h0.8
  text "31" at 66.9,113.2 h0.8
  text "33" at 69.4,113.2 h0.8
  text "35" at 72,113.2 h0.8
  text "NC" at 74.5,113.2 h0.8
  text "3V" at 77,113.2 h0.8
  text "41" at 79.7,113.2 h0.8
  text "43" at 82,113.2 h0.8
  text "45" at 84.5,113.2 h0.8
  text "NC" at 87.2,113.2 h0.8
  text "NC" at 89.8,113.2 h0.8
  text "gnd" at 92.4,113.2 h0.8
  text "gnd" at 77.1,107.3 h0.8
  text "26" at 61.6,107.1 h0.8
  text "28" at 64.1,107.1 h0.8
  text "30" at 66.8,107.1 h0.8
  text "32" at 69.3,107.1 h0.8
  text "34" at 71.8,107.1 h0.8
  text "36" at 74.3,107.1 h0.8
  text "40" at 79.4,107.1 h0.8
  text "42" at 81.9,107.1 h0.8
  text "44" at 84.6,107.1 h0.8
  text "46" at 87,107.1 h0.8
  text "NC" at 89.7,107.1 h0.8
  text "3V" at 92.2,107.1 h0.8

## Text inside footprints (layer, text, board x,y; h text height)
JTAG: Top Overlay "2" at 89.408,114.3 h0.8 r90; Top Overlay "1" at 91.948,114.808 h0.8 r90; Top Overlay "9" at 91.948,128.524 h0.8 r90; Top Overlay "10" at 89.408,128.524 h0.8 r90
U3: Mechanical 13 "Pb" at 83.861,118.057 h1